# EAGLE board _PortExpanderXRA1207 (EAGLE 7.2.0)
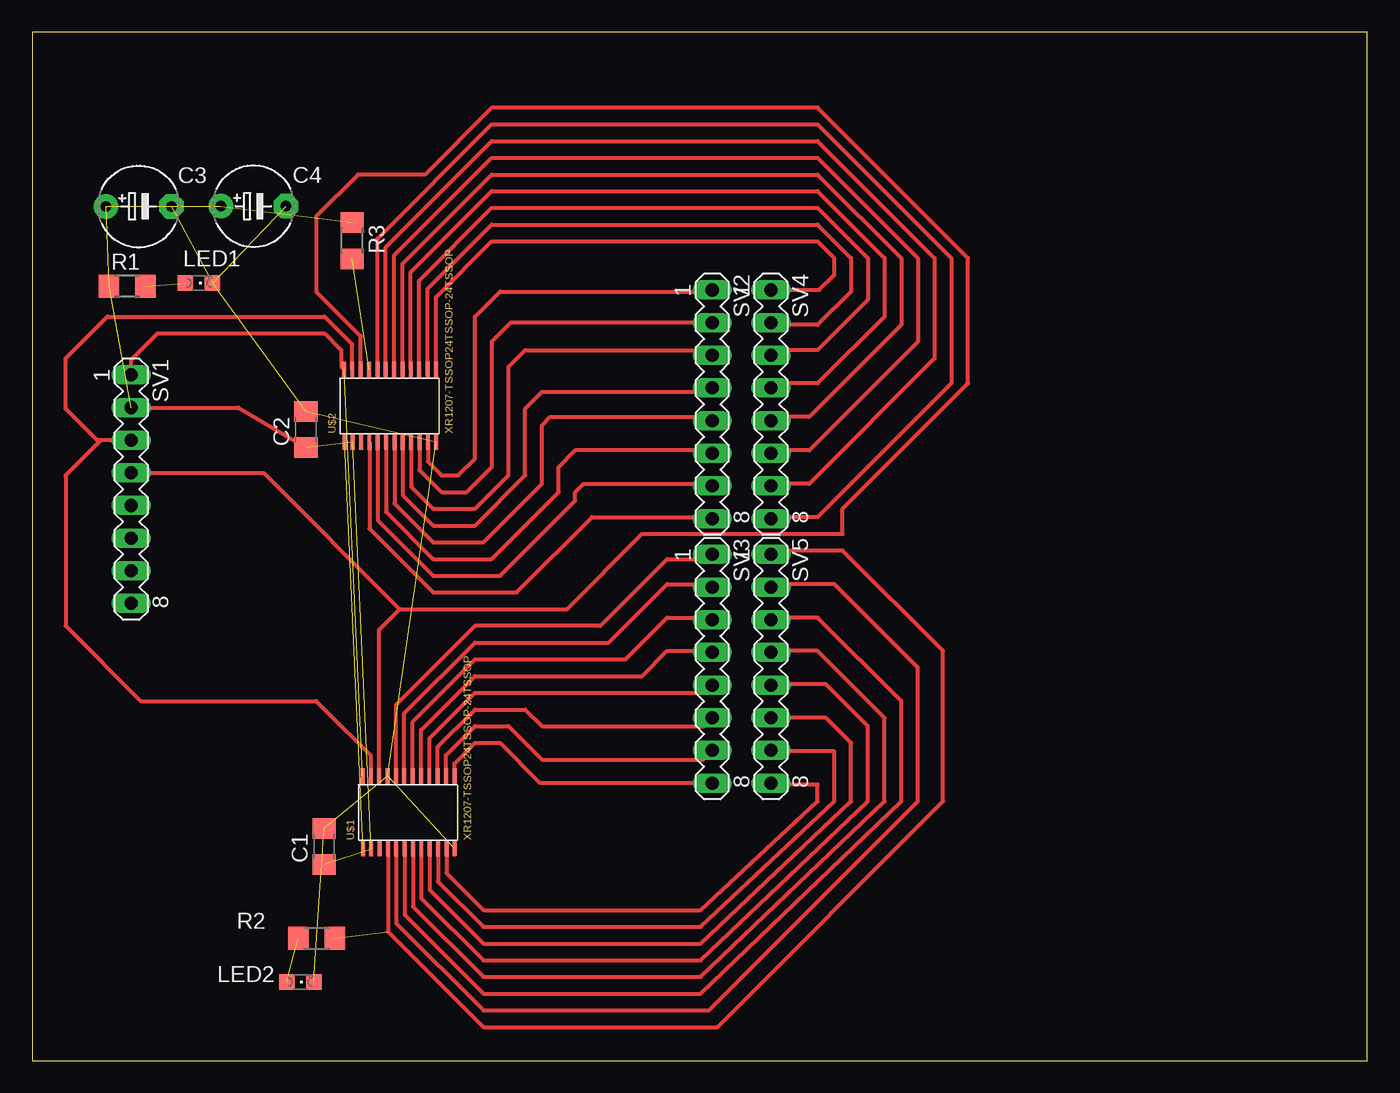
[diagram p0: board, top side]

Size 103.9 x 80 mm. Coordinates in mm from the lower left corner, seen from the top.
Outline: 0,0 103.9,0 103.9,80 0,80 0,0
Copper layers (1*16): Top 0.035mm / dielectric 1.5mm / Bottom 0.035mm
Design rules "default": minimum track width 10mil, minimum drill 24mil, track to track 8mil, track to pad 8mil, pad to pad 8mil, via to via 8mil, smd to smd 8mil, copper to edge 40mil, drill to drill 8mil, minimum pad ring 10mil, minimum via ring 8mil, stop-mask expansion 4mil, vias tented up to drill 0mil, thermal gap 10mil

## Footprints (pad centres in the part's own frame; a part is rotated, then mirrored left to right if it is on the bottom)
C1206 = smd 1.6 x 1.8: 1 -1.4,0; 2 1.4,0
E5-6 = drill 0.813 pad 1.905: + -2.54,0 | drill 0.813 pad 1.905 octagon: - 2.54,0
CHIPLED_0805 = smd 1.2 x 1.2: A 0,-1.05; C 0,1.05
R1206 = smd 1.6 x 1.803: 1 -1.422,0; 2 1.422,0
MA08-1 = drill 1.016 long: 1 -8.89,0; 2 -6.35,0; 3 -3.81,0; 4 -1.27,0; 5 1.27,0; 6 3.81,0; 7 6.35,0; 8 8.89,0
TSSOP-24 = smd 1.206 x 0.305: 1 -0.65,-0.351; 2 -0.65,-0.975; 3 -0.65,-1.626; 4 -0.65,-2.276; 5 -0.65,-2.926; 6 -0.65,-3.576; 7 -0.65,-4.227; 8 -0.65,-4.877; 9 -0.65,-5.527; 10 -0.65,-6.177; 11 -0.65,-6.828; 12 -0.65,-7.478; 13 4.999,-7.452; 14 4.999,-6.802; 15 4.999,-6.152; 16 4.999,-5.502; 17 4.999,-4.851; 18 4.999,-4.201; 19 4.999,-3.551; 20 4.999,-2.901; 21 4.999,-2.25; 22 4.999,-1.6; 23 4.999,-0.95; 24 4.999,-0.3

## Placement (x,y rotation side)
C1  [C1206]  22.73,16.67 90 top
C2  [C1206]  21.31,49.08 90 top
C3  [E5-6]  8.29,66.45 0 top
C4  [E5-6]  17.22,66.47 0 top
LED1  RED  [CHIPLED_0805]  12.99,60.48 270 top
LED2  GREEN  [CHIPLED_0805]  20.86,6.12 270 top
R1  330R  [R1206]  7.41,60.23 0 top
R2  330R  [R1206]  22.13,9.52 180 top
R3  5.1K  [R1206]  24.91,63.78 270 top
SV1  [MA08-1]  7.71,44.45 270 top
SV2  [MA08-1]  52.92,51.05 270 top
SV3  [MA08-1]  52.92,30.48 270 top
SV4  [MA08-1]  57.5,51.05 270 top
SV5  [MA08-1]  57.5,30.48 270 top
U$1  XR1207-TSSOP24TSSOP-24TSSOP  [TSSOP-24]  25.41,17.14 90 top
U$2  XR1207-TSSOP24TSSOP-24TSSOP  [TSSOP-24]  23.97,48.77 90 top

## Library data of the parts
C1-C4 R1-R3 = resistor
LED1 LED2 = led
SV1-SV5 = con-lstb; OC_FARNELL: unknown; OC_NEWARK: unknown
U$1 U$2 = ExarLib

## Nets
ADDR_HI: R3.2 U$2.21
GND: C1.2 C2.2 C3.- C4.- LED1.C LED2.C U$1.12 U$1.21 U$2.12
IRQ#: U$1.1 U$2.1
N$1: LED1.A R1.2
N$2: LED2.A R2.2
P0: SV2.1 U$2.11
P1: SV2.2 U$2.10
P2: SV2.3 U$2.9
P3: SV2.4 U$2.8
P4: SV2.5 U$2.7
P5: SV2.6 U$2.6
P6: SV2.7 U$2.5
P7: SV2.8 U$2.4
P8: SV3.1 U$1.20
P9: SV3.2 U$1.19
P10: SV3.3 U$1.18
P11: SV3.4 U$1.17
P12: SV3.5 U$1.16
P13: SV3.6 U$1.15
P14: SV3.7 U$1.14
P15: SV3.8 U$1.13
P16: R2.1 SV5.1 U$1.4
P17: SV5.2 U$1.5
P18: SV5.3 U$1.6
P19: SV5.4 U$1.7
P20: SV5.5 U$1.8
P21: SV5.6 U$1.9
P22: SV5.7 U$1.10
P23: SV5.8 U$1.11
P24: SV4.1 U$2.13
P25: SV4.2 U$2.14
P26: SV4.3 U$2.15
P27: SV4.4 U$2.16
P28: SV4.5 U$2.17
P29: SV4.6 U$2.18
P30: SV4.7 U$2.19
P31: SV4.8 U$2.20
RESET#: U$1.3
SCLK: SV1.4 U$1.22 U$2.22
SDA: SV1.3 U$1.23 U$2.23
VCC: C1.1 C2.1 C3.+ C4.+ R1.1 R3.1 SV1.2 U$1.2 U$2.2
VCCP: SV1.1 U$1.24 U$2.24

## Tracks (layer width: path | path; a pad name or v marks a point on that pad's centre or on a via)
ADDR_HI  (1 unrouted)
GND  (8 unrouted)
IRQ#  (1 unrouted)
N$1  (1 unrouted)
N$2  (1 unrouted)
P0
  Top 0.305: U$2.11 30.8,46.58 31.86,45.52 33.16,45.52 34.46,46.82 34.46,57.87 36.41,59.82 52.8,59.82 SV2.1
P1
  Top 0.305: SV2.2 37.25,57.4 35.76,55.92 35.76,46.17 33.81,44.22 31.86,44.22 30.14,45.93 U$2.10
P2
  Top 0.305: U$2.9 29.49,44.63 31.21,42.92 34.46,42.92 37.06,45.52 37.06,53.97 38.36,55.27 52.52,55.27 SV2.3
P3
  Top 0.305: U$2.8 28.84,43.98 31.21,41.62 34.46,41.62 | 34.46,41.62 | 34.46,41.62 38.36,45.52 38.36,50.72 39.66,52.02 52.62,52.02 SV2.4
P4
  Top 0.305: U$2.7 28.19,43.33 31.21,40.31 35.11,40.31 39.66,44.87 39.66,49.42 40.31,50.07 52.64,50.07 SV2.5
P5
  Top 0.305: U$2.6 27.54,42.68 31.21,39.01 35.76,39.01 40.97,44.22 40.97,46.17 42.27,47.47 52.7,47.47 SV2.6
P6
  Top 0.305: U$2.5 26.89,42.03 31.21,37.71 36.41,37.71 42.27,43.57 42.27,44.22 42.92,44.87 52.76,44.87 SV2.7
P7
  Top 0.305: U$2.4 26.24,41.38 31.21,36.41 37.71,36.41 43.57,42.27 52.82,42.27 SV2.8
P8
  Top 0.305: U$1.20 28.31,27.66 34.46,33.81 44.22,33.81 49.42,39.01 52.57,39.01 SV3.1
P9
  Top 0.305: U$1.19 28.96,27.01 34.46,32.51 44.87,32.51 49.42,37.06 52.69,37.06 SV3.2
P10
  Top 0.305: U$1.18 29.61,26.36 34.46,31.21 46.17,31.21 49.42,34.46 52.75,34.46 SV3.3
P11
  Top 0.305: U$1.17 30.26,25.71 34.46,29.91 47.47,29.91 49.42,31.86 52.81,31.86 SV3.4
P12
  Top 0.305: U$1.16 30.91,25.06 34.46,28.61 52.32,28.61 SV3.5
P13
  Top 0.305: U$1.15 31.56,24.41 34.46,27.31 38.36,27.31 39.66,26.01 52.26,26.01 SV3.6
P14
  Top 0.305: U$1.14 32.21,23.76 34.46,26.01 37.06,26.01 39.66,23.41 52.2,23.41 SV3.7
P15
  Top 0.305: SV3.8 39.53,21.59 36.41,24.71 34.46,24.71 32.86,23.11 U$1.13
P16  (1 unrouted)
  Top 0.305: U$1.4 27.69,10.03 35.11,2.6 53.32,2.6 70.88,20.16 70.88,31.86 63.07,39.66 57.79,39.66 SV5.1
P17
  Top 0.305: U$1.5 28.34,10.68 35.11,3.9 52.67,3.9 68.93,20.16 68.93,30.56 62.42,37.06 57.73,37.06 SV5.2
P18
  Top 0.305: U$1.6 28.99,11.33 35.11,5.2 52.02,5.2 67.63,20.16 67.63,27.96 61.12,34.46 57.67,34.46 SV5.3
P19
  Top 0.305: U$1.7 29.64,11.98 35.11,6.5 52.02,6.5 66.32,20.16 66.32,26.66 61.12,31.86 57.61,31.86 SV5.4
P20
  Top 0.305: U$1.8 30.29,12.63 35.11,7.8 52.02,7.8 65.02,20.16 65.02,26.01 61.77,29.26 57.55,29.26 SV5.5
P21
  Top 0.305: U$1.9 30.94,13.28 35.11,9.1 52.02,9.1 63.72,20.16 63.72,24.71 61.77,26.66 57.51,26.66 SV5.6
P22
  Top 0.305: U$1.10 31.59,13.93 35.11,10.4 52.02,10.4 62.42,20.16 62.42,24.06 57.57,24.06 SV5.7
P23
  Top 0.305: U$1.11 32.24,14.58 35.11,11.7 52.02,11.7 61.12,20.16 61.12,21.46 | 61.12,21.46 60.47,21.46 59.82,21.46 | 61.12,21.46 59.82,21.46 | 59.82,21.46 57.63,21.46 SV5.8
P24
  Top 0.305: U$2.13 31.42,59.38 35.76,63.72 61.12,63.72 62.42,62.42 62.42,61.12 61.24,59.94 SV4.1
P25
  Top 0.305: U$2.14 30.77,60.03 35.76,65.02 61.12,65.02 63.72,62.42 63.72,59.82 61.12,57.22 57.68,57.22 SV4.2
P26
  Top 0.305: U$2.15 30.12,60.68 35.76,66.32 61.12,66.32 65.02,62.42 65.02,59.17 61.12,55.27 57.9,55.27 SV4.3
P27
  Top 0.305: U$2.16 29.47,61.33 35.76,67.62 61.12,67.62 66.32,62.42 66.32,57.87 61.12,52.67 57.84,52.67 SV4.4
P28
  Top 0.305: U$2.17 28.82,61.98 35.76,68.92 61.12,68.92 67.63,62.42 67.63,57.22 60.47,50.07 57.78,50.07 SV4.5
P29
  Top 0.305: U$2.18 28.17,62.63 35.76,70.23 61.12,70.23 68.93,62.42 68.93,55.92 60.47,47.47 57.72,47.47 SV4.6
P30
  Top 0.305: U$2.19 27.52,63.28 35.76,71.53 61.12,71.53 70.23,62.42 70.23,54.62 60.47,44.87 57.66,44.87 SV4.7
P31
  Top 0.305: U$2.20 26.87,63.93 35.76,72.83 61.12,72.83 71.53,62.42 71.53,52.67 61.12,42.27 57.6,42.27 SV4.8
SCLK
  Top 0.305: SV1.4 18,45.72 28.61,35.11 | 28.61,35.11 41.62,35.11 47.47,40.97 63.07,40.97 63.07,42.92 72.83,52.67 72.83,62.42 | 72.83,62.42 | 72.83,62.42 61.12,74.13 35.76,74.13 | 35.76,74.13 | 35.76,74.13 30.56,68.92 25.36,68.92 22.11,65.67 22.11,59.82 25.57,56.36 U$2.22 | 35.76,74.13 | U$1.22 27.01,33.51 28.61,35.11
SDA
  Top 0.305: U$2.23 24.92,55.71 22.76,57.87 5.85,57.87 2.6,54.62 2.6,50.72 5.06,48.26 SV1.3 5.34,48.26 2.6,45.52 2.6,33.81 8.45,27.96 22.11,27.96 22.76,27.31 | U$1.23 26.36,23.71 22.76,27.31 | 22.76,27.31
VCC  (7 unrouted)
  Top 0.305: C2.1 16.03,50.8 SV1.2 7.63,50.72
VCCP  (1 unrouted)
  Top 0.305: SV1.1 7.71,54.53 9.75,56.57 22.76,56.57 24.06,55.27 24.06,53.98 U$2.24